# EAGLE board vr60 (EAGLE 9.5.1)

Size 285 x 94.6 mm. Coordinates in mm from the lower left corner, seen from the top.
Outline: 1,0 284,0 arc90 285,1 285,36.6 282,36.6 arc-180 282,39.6 285,39.6 285,93.6 arc90 284,94.6 1,94.6 arc90 0,93.6 0,39.6 3,39.6 arc-180 3,36.6 0,36.6 0,1 arc90 1,0
Copper layers (1*16): Top 0.035mm / dielectric 1.5mm / Bottom 0.035mm
Design rules "default": minimum track width 6mil, minimum drill 0.35mm, track to track 6mil, track to pad 6mil, pad to pad 6mil, via to via 6mil, smd to smd 6mil, copper to edge 40mil, drill to drill 6mil, minimum pad ring 10mil, minimum via ring 8mil, stop-mask expansion 4mil, vias tented up to drill 0mil, thermal gap 10mil
Holes 3 mm at 260.05,66.7 25.2,66.7 128.2,47.6 190.5,9.3 3,38.1 282,38.1 25,65.8 260,65.8 136,56.8 237,20.8 74,15.8

## Footprints (pad centres in the part's own frame; a part is rotated, then mirrored left to right if it is on the bottom)
MX-STABS-200U = hole 3.988: -11.938,8.255; 11.938,8.255 | hole 3.048: -11.938,-6.985; 11.938,-6.985
MX-STABS-625U = hole 3.988: -50,8.255; 50,8.255 | hole 3.048: -50,-6.985; 50,-6.985
SOD-123 = smd 0.914 x 1.219: A 1.638,0; C -1.638,0
MX-5-PIN-HOTSWAP = smd 2.55 x 2.5 bottom: P$1 -7.085,2.54; P$2 5.842,5.08 | hole 3.988: 0,0 | hole 1.75: -5.08,0; 5.08,0 | hole 3: 2.54,5.08; -3.81,2.54

## Placement (x,y rotation side)
B14  MX-STABS-200U  [MX-STABS-200U]  266,85.5 180 top
B41  MX-STABS-200U  [MX-STABS-200U]  263.62,47.5 180 top
B42  MX-STABS-200U  [MX-STABS-200U]  21.38,28.5 180 top
B53  MX-STABS-200U  [MX-STABS-200U]  258.88,28.5 180 top
B57  MX-STABS-625U  [MX-STABS-625U]  130.62,9.5 0 top
D1  [SOD-123]  16.62,90 270 bottom
D2  [SOD-123]  35.62,90 270 bottom
D3  [SOD-123]  54.62,90 270 bottom
D4  [SOD-123]  73.62,90 270 bottom
D5  [SOD-123]  92.62,90 270 bottom
D6  [SOD-123]  111.62,90 270 bottom
D7  [SOD-123]  130.62,90 270 bottom
D8  [SOD-123]  149.62,90 270 bottom
D9  [SOD-123]  168.62,90 270 bottom
D10  [SOD-123]  187.62,90 270 bottom
D11  [SOD-123]  206.62,90 270 bottom
D12  [SOD-123]  225.62,90 270 bottom
D13  [SOD-123]  244.62,90 270 bottom
D14  [SOD-123]  273.12,90 270 bottom
D15  [SOD-123]  21.38,71 270 bottom
D16  [SOD-123]  45.12,71 270 bottom
D17  [SOD-123]  64.12,71 270 bottom
D18  [SOD-123]  83.12,71 270 bottom
D19  [SOD-123]  102.12,71 270 bottom
D20  [SOD-123]  121.12,71 270 bottom
D21  [SOD-123]  140.12,71 270 bottom
D22  [SOD-123]  159.12,71 270 bottom
D23  [SOD-123]  178.12,71 270 bottom
D24  [SOD-123]  197.12,71 270 bottom
D25  [SOD-123]  216.12,71 270 bottom
D26  [SOD-123]  235.12,71 270 bottom
D27  [SOD-123]  254.12,71 270 bottom
D28  [SOD-123]  277.88,71 270 bottom
D29  [SOD-123]  23.75,52 270 bottom
D30  [SOD-123]  49.88,52 270 bottom
D31  [SOD-123]  68.88,52 270 bottom
D32  [SOD-123]  87.88,52 270 bottom
D33  [SOD-123]  106.88,52 270 bottom
D34  [SOD-123]  125.88,52 270 bottom
D35  [SOD-123]  144.88,52 270 bottom
D36  [SOD-123]  163.88,52 270 bottom
D37  [SOD-123]  182.88,52 270 bottom
D38  [SOD-123]  201.88,52 270 bottom
D39  [SOD-123]  220.88,52 270 bottom
D40  [SOD-123]  239.88,52 270 bottom
D41  [SOD-123]  270.75,52 270 bottom
D42  [SOD-123]  28.5,33 270 bottom
D43  [SOD-123]  59.38,33 270 bottom
D44  [SOD-123]  78.38,33 270 bottom
D45  [SOD-123]  97.38,33 270 bottom
D46  [SOD-123]  116.38,33 270 bottom
D47  [SOD-123]  135.38,33 270 bottom
D48  [SOD-123]  154.38,33 270 bottom
D49  [SOD-123]  173.38,33 270 bottom
D50  [SOD-123]  192.38,33 270 bottom
D51  [SOD-123]  211.38,33 270 bottom
D52  [SOD-123]  230.38,33 270 bottom
D53  [SOD-123]  266,33 270 bottom
D54  [SOD-123]  19,14 270 bottom
D55  [SOD-123]  42.75,14 270 bottom
D56  [SOD-123]  66.5,14 270 bottom
D57  [SOD-123]  137.75,14 270 bottom
D58  [SOD-123]  209,14 270 bottom
D59  [SOD-123]  232.75,14 270 bottom
D60  [SOD-123]  256.5,14 270 bottom
D61  [SOD-123]  280.25,14 270 bottom
S1  MX-5-PIN-HOTSWAP  [MX-5-PIN-HOTSWAP]  9.5,85.5 180 top
S2  MX-5-PIN-HOTSWAP  [MX-5-PIN-HOTSWAP]  28.5,85.5 180 top
S3  MX-5-PIN-HOTSWAP  [MX-5-PIN-HOTSWAP]  47.5,85.5 180 top
S4  MX-5-PIN-HOTSWAP  [MX-5-PIN-HOTSWAP]  66.5,85.5 180 top
S5  MX-5-PIN-HOTSWAP  [MX-5-PIN-HOTSWAP]  85.5,85.5 180 top
S6  MX-5-PIN-HOTSWAP  [MX-5-PIN-HOTSWAP]  104.5,85.5 180 top
S7  MX-5-PIN-HOTSWAP  [MX-5-PIN-HOTSWAP]  123.5,85.5 180 top
S8  MX-5-PIN-HOTSWAP  [MX-5-PIN-HOTSWAP]  142.5,85.5 180 top
S9  MX-5-PIN-HOTSWAP  [MX-5-PIN-HOTSWAP]  161.5,85.5 180 top
S10  MX-5-PIN-HOTSWAP  [MX-5-PIN-HOTSWAP]  180.5,85.5 180 top
S11  MX-5-PIN-HOTSWAP  [MX-5-PIN-HOTSWAP]  199.5,85.5 180 top
S12  MX-5-PIN-HOTSWAP  [MX-5-PIN-HOTSWAP]  218.5,85.5 180 top
S13  MX-5-PIN-HOTSWAP  [MX-5-PIN-HOTSWAP]  237.5,85.5 180 top
S14  MX-5-PIN-HOTSWAP  [MX-5-PIN-HOTSWAP]  266,85.5 180 top
S15  MX-5-PIN-HOTSWAP  [MX-5-PIN-HOTSWAP]  14.25,66.5 180 top
S16  MX-5-PIN-HOTSWAP  [MX-5-PIN-HOTSWAP]  38,66.5 180 top
S17  MX-5-PIN-HOTSWAP  [MX-5-PIN-HOTSWAP]  57,66.5 180 top
S18  MX-5-PIN-HOTSWAP  [MX-5-PIN-HOTSWAP]  76,66.5 180 top
S19  MX-5-PIN-HOTSWAP  [MX-5-PIN-HOTSWAP]  95,66.5 180 top
S20  MX-5-PIN-HOTSWAP  [MX-5-PIN-HOTSWAP]  114,66.5 180 top
S21  MX-5-PIN-HOTSWAP  [MX-5-PIN-HOTSWAP]  133,66.5 180 top
S22  MX-5-PIN-HOTSWAP  [MX-5-PIN-HOTSWAP]  152,66.5 180 top
S23  MX-5-PIN-HOTSWAP  [MX-5-PIN-HOTSWAP]  171,66.5 180 top
S24  MX-5-PIN-HOTSWAP  [MX-5-PIN-HOTSWAP]  190,66.5 180 top
S25  MX-5-PIN-HOTSWAP  [MX-5-PIN-HOTSWAP]  209,66.5 180 top
S26  MX-5-PIN-HOTSWAP  [MX-5-PIN-HOTSWAP]  228,66.5 180 top
S27  MX-5-PIN-HOTSWAP  [MX-5-PIN-HOTSWAP]  247,66.5 180 top
S28  MX-5-PIN-HOTSWAP  [MX-5-PIN-HOTSWAP]  270.75,66.5 180 top
S29  MX-5-PIN-HOTSWAP  [MX-5-PIN-HOTSWAP]  16.62,47.5 180 top
S30  MX-5-PIN-HOTSWAP  [MX-5-PIN-HOTSWAP]  42.75,47.5 180 top
S31  MX-5-PIN-HOTSWAP  [MX-5-PIN-HOTSWAP]  61.75,47.5 180 top
S32  MX-5-PIN-HOTSWAP  [MX-5-PIN-HOTSWAP]  80.75,47.5 180 top
S33  MX-5-PIN-HOTSWAP  [MX-5-PIN-HOTSWAP]  99.75,47.5 180 top
S34  MX-5-PIN-HOTSWAP  [MX-5-PIN-HOTSWAP]  118.75,47.5 180 top
S35  MX-5-PIN-HOTSWAP  [MX-5-PIN-HOTSWAP]  137.75,47.5 180 top
S36  MX-5-PIN-HOTSWAP  [MX-5-PIN-HOTSWAP]  156.75,47.5 180 top
S37  MX-5-PIN-HOTSWAP  [MX-5-PIN-HOTSWAP]  175.75,47.5 180 top
S38  MX-5-PIN-HOTSWAP  [MX-5-PIN-HOTSWAP]  194.75,47.5 180 top
S39  MX-5-PIN-HOTSWAP  [MX-5-PIN-HOTSWAP]  213.75,47.5 180 top
S40  MX-5-PIN-HOTSWAP  [MX-5-PIN-HOTSWAP]  232.75,47.5 180 top
S41  MX-5-PIN-HOTSWAP  [MX-5-PIN-HOTSWAP]  263.62,47.5 180 top
S42  MX-5-PIN-HOTSWAP  [MX-5-PIN-HOTSWAP]  21.38,28.5 180 top
S43  MX-5-PIN-HOTSWAP  [MX-5-PIN-HOTSWAP]  52.25,28.5 180 top
S44  MX-5-PIN-HOTSWAP  [MX-5-PIN-HOTSWAP]  71.25,28.5 180 top
S45  MX-5-PIN-HOTSWAP  [MX-5-PIN-HOTSWAP]  90.25,28.5 180 top
S46  MX-5-PIN-HOTSWAP  [MX-5-PIN-HOTSWAP]  109.25,28.5 180 top
S47  MX-5-PIN-HOTSWAP  [MX-5-PIN-HOTSWAP]  128.25,28.5 180 top
S48  MX-5-PIN-HOTSWAP  [MX-5-PIN-HOTSWAP]  147.25,28.5 180 top
S49  MX-5-PIN-HOTSWAP  [MX-5-PIN-HOTSWAP]  166.25,28.5 180 top
S50  MX-5-PIN-HOTSWAP  [MX-5-PIN-HOTSWAP]  185.25,28.5 180 top
S51  MX-5-PIN-HOTSWAP  [MX-5-PIN-HOTSWAP]  204.25,28.5 180 top
S52  MX-5-PIN-HOTSWAP  [MX-5-PIN-HOTSWAP]  223.25,28.5 180 top
S53  MX-5-PIN-HOTSWAP  [MX-5-PIN-HOTSWAP]  258.88,28.5 180 top
S54  MX-5-PIN-HOTSWAP  [MX-5-PIN-HOTSWAP]  11.88,9.5 180 top
S55  MX-5-PIN-HOTSWAP  [MX-5-PIN-HOTSWAP]  35.62,9.5 180 top
S56  MX-5-PIN-HOTSWAP  [MX-5-PIN-HOTSWAP]  59.38,9.5 180 top
S57  MX-5-PIN-HOTSWAP  [MX-5-PIN-HOTSWAP]  130.62,9.5 180 top
S58  MX-5-PIN-HOTSWAP  [MX-5-PIN-HOTSWAP]  201.88,9.5 180 top
S59  MX-5-PIN-HOTSWAP  [MX-5-PIN-HOTSWAP]  225.62,9.5 180 top
S60  MX-5-PIN-HOTSWAP  [MX-5-PIN-HOTSWAP]  249.38,9.5 180 top
S61  MX-5-PIN-HOTSWAP  [MX-5-PIN-HOTSWAP]  273.12,9.5 180 top
Z1  MX-FPRINT-100U19  [MX-FPRINT-1900-100U]  9.5,85.5 0 top
Z2  MX-FPRINT-100U19  [MX-FPRINT-1900-100U]  28.5,85.5 0 top
Z3  MX-FPRINT-100U19  [MX-FPRINT-1900-100U]  47.5,85.5 0 top
Z4  MX-FPRINT-100U19  [MX-FPRINT-1900-100U]  66.5,85.5 0 top
Z5  MX-FPRINT-100U19  [MX-FPRINT-1900-100U]  85.5,85.5 0 top
Z6  MX-FPRINT-100U19  [MX-FPRINT-1900-100U]  104.5,85.5 0 top
Z7  MX-FPRINT-100U19  [MX-FPRINT-1900-100U]  123.5,85.5 0 top
Z8  MX-FPRINT-100U19  [MX-FPRINT-1900-100U]  142.5,85.5 0 top
Z9  MX-FPRINT-100U19  [MX-FPRINT-1900-100U]  161.5,85.5 0 top
Z10  MX-FPRINT-100U19  [MX-FPRINT-1900-100U]  180.5,85.5 0 top
Z11  MX-FPRINT-100U19  [MX-FPRINT-1900-100U]  199.5,85.5 0 top
Z12  MX-FPRINT-100U19  [MX-FPRINT-1900-100U]  218.5,85.5 0 top
Z13  MX-FPRINT-100U19  [MX-FPRINT-1900-100U]  237.5,85.5 0 top
Z14  MX-FPRINT-200U19  [MX-FPRINT-1900-200U]  266,85.5 0 top
Z15  MX-FPRINT-150U19  [MX-FPRINT-1900-150U]  14.25,66.5 0 top
Z16  MX-FPRINT-100U19  [MX-FPRINT-1900-100U]  38,66.5 0 top
Z17  MX-FPRINT-100U19  [MX-FPRINT-1900-100U]  57,66.5 0 top
Z18  MX-FPRINT-100U19  [MX-FPRINT-1900-100U]  76,66.5 0 top
Z19  MX-FPRINT-100U19  [MX-FPRINT-1900-100U]  95,66.5 0 top
Z20  MX-FPRINT-100U19  [MX-FPRINT-1900-100U]  114,66.5 0 top
Z21  MX-FPRINT-100U19  [MX-FPRINT-1900-100U]  133,66.5 0 top
Z22  MX-FPRINT-100U19  [MX-FPRINT-1900-100U]  152,66.5 0 top
Z23  MX-FPRINT-100U19  [MX-FPRINT-1900-100U]  171,66.5 0 top
Z24  MX-FPRINT-100U19  [MX-FPRINT-1900-100U]  190,66.5 0 top
Z25  MX-FPRINT-100U19  [MX-FPRINT-1900-100U]  209,66.5 0 top
Z26  MX-FPRINT-100U19  [MX-FPRINT-1900-100U]  228,66.5 0 top
Z27  MX-FPRINT-100U19  [MX-FPRINT-1900-100U]  247,66.5 0 top
Z28  MX-FPRINT-150U19  [MX-FPRINT-1900-150U]  270.75,66.5 0 top
Z29  MX-FPRINT-175U19  [MX-FPRINT-1900-175U]  16.62,47.5 0 top
Z30  MX-FPRINT-100U19  [MX-FPRINT-1900-100U]  42.75,47.5 0 top
Z31  MX-FPRINT-100U19  [MX-FPRINT-1900-100U]  61.75,47.5 0 top
Z32  MX-FPRINT-100U19  [MX-FPRINT-1900-100U]  80.75,47.5 0 top
Z33  MX-FPRINT-100U19  [MX-FPRINT-1900-100U]  99.75,47.5 0 top
Z34  MX-FPRINT-100U19  [MX-FPRINT-1900-100U]  118.75,47.5 0 top
Z35  MX-FPRINT-100U19  [MX-FPRINT-1900-100U]  137.75,47.5 0 top
Z36  MX-FPRINT-100U19  [MX-FPRINT-1900-100U]  156.75,47.5 0 top
Z37  MX-FPRINT-100U19  [MX-FPRINT-1900-100U]  175.75,47.5 0 top
Z38  MX-FPRINT-100U19  [MX-FPRINT-1900-100U]  194.75,47.5 0 top
Z39  MX-FPRINT-100U19  [MX-FPRINT-1900-100U]  213.75,47.5 0 top
Z40  MX-FPRINT-100U19  [MX-FPRINT-1900-100U]  232.75,47.5 0 top
Z41  MX-FPRINT-225U19  [MX-FPRINT-1900-225U]  263.62,47.5 0 top
Z42  MX-FPRINT-225U19  [MX-FPRINT-1900-225U]  21.38,28.5 0 top
Z43  MX-FPRINT-100U19  [MX-FPRINT-1900-100U]  52.25,28.5 0 top
Z44  MX-FPRINT-100U19  [MX-FPRINT-1900-100U]  71.25,28.5 0 top
Z45  MX-FPRINT-100U19  [MX-FPRINT-1900-100U]  90.25,28.5 0 top
Z46  MX-FPRINT-100U19  [MX-FPRINT-1900-100U]  109.25,28.5 0 top
Z47  MX-FPRINT-100U19  [MX-FPRINT-1900-100U]  128.25,28.5 0 top
Z48  MX-FPRINT-100U19  [MX-FPRINT-1900-100U]  147.25,28.5 0 top
Z49  MX-FPRINT-100U19  [MX-FPRINT-1900-100U]  166.25,28.5 0 top
Z50  MX-FPRINT-100U19  [MX-FPRINT-1900-100U]  185.25,28.5 0 top
Z51  MX-FPRINT-100U19  [MX-FPRINT-1900-100U]  204.25,28.5 0 top
Z52  MX-FPRINT-100U19  [MX-FPRINT-1900-100U]  223.25,28.5 0 top
Z53  MX-FPRINT-275U19  [MX-FPRINT-1900-275U]  258.88,28.5 0 top
Z54  MX-FPRINT-125U19  [MX-FPRINT-1900-125U]  11.88,9.5 0 top
Z55  MX-FPRINT-125U19  [MX-FPRINT-1900-125U]  35.62,9.5 0 top
Z56  MX-FPRINT-125U19  [MX-FPRINT-1900-125U]  59.38,9.5 0 top
Z57  MX-FPRINT-625U19  [MX-FPRINT-1900-625U]  130.62,9.5 0 top
Z58  MX-FPRINT-125U19  [MX-FPRINT-1900-125U]  201.88,9.5 0 top
Z59  MX-FPRINT-125U19  [MX-FPRINT-1900-125U]  225.62,9.5 0 top
Z60  MX-FPRINT-125U19  [MX-FPRINT-1900-125U]  249.38,9.5 0 top
Z61  MX-FPRINT-125U19  [MX-FPRINT-1900-125U]  273.12,9.5 0 top

## Library data of the parts
B14 B41 B42 B53 B57 S1-S61 Z1-Z61 = ts_keyboards
D1-D61 = jlcpcb_basic_parts

## Nets
COL0: D1.C D15.C D29.C D42.C D54.C
COL1: D2.C D16.C D30.C D55.C
COL2: D3.C D17.C D31.C D43.C D56.C
COL3: D4.C D18.C D32.C D44.C
COL4: D5.C D19.C D33.C D45.C
COL5: D6.C D20.C D34.C D46.C
COL6: D7.C D21.C D35.C D47.C D57.C
COL7: D8.C D22.C D36.C D48.C
COL8: D9.C D23.C D37.C D49.C
COL9: D10.C D24.C D38.C D50.C
COL10: D11.C D25.C D39.C D51.C D58.C
COL11: D12.C D26.C D40.C D52.C D59.C
COL12: D13.C D27.C D60.C
COL13: D14.C D28.C D41.C D53.C D61.C
N$1: D1.A S1.P$1
N$2: D2.A S2.P$1
N$3: D3.A S3.P$1
N$4: D4.A S4.P$1
N$5: D5.A S5.P$1
N$6: D6.A S6.P$1
N$7: D7.A S7.P$1
N$8: D8.A S8.P$1
N$9: D9.A S9.P$1
N$10: D10.A S10.P$1
N$11: D11.A S11.P$1
N$12: D12.A S12.P$1
N$13: D13.A S13.P$1
N$14: D14.A S14.P$1
N$15: D15.A S15.P$1
N$16: D16.A S16.P$1
N$17: D17.A S17.P$1
N$18: D18.A S18.P$1
N$19: D19.A S19.P$1
N$20: D20.A S20.P$1
N$21: D21.A S21.P$1
N$22: D22.A S22.P$1
N$23: D23.A S23.P$1
N$24: D24.A S24.P$1
N$25: D25.A S25.P$1
N$26: D26.A S26.P$1
N$27: D27.A S27.P$1
N$28: D28.A S28.P$1
N$29: D29.A S29.P$1
N$30: D30.A S30.P$1
N$31: D31.A S31.P$1
N$32: D32.A S32.P$1
N$33: D33.A S33.P$1
N$34: D34.A S34.P$1
N$35: D35.A S35.P$1
N$36: D36.A S36.P$1
N$37: D37.A S37.P$1
N$38: D38.A S38.P$1
N$39: D39.A S39.P$1
N$40: D40.A S40.P$1
N$41: D41.A S41.P$1
N$42: D42.A S42.P$1
N$43: D43.A S43.P$1
N$44: D44.A S44.P$1
N$45: D45.A S45.P$1
N$46: D46.A S46.P$1
N$47: D47.A S47.P$1
N$48: D48.A S48.P$1
N$49: D49.A S49.P$1
N$50: D50.A S50.P$1
N$51: D51.A S51.P$1
N$52: D52.A S52.P$1
N$53: D53.A S53.P$1
N$54: D54.A S54.P$1
N$55: D55.A S55.P$1
N$56: D56.A S56.P$1
N$57: D57.A S57.P$1
N$58: D58.A S58.P$1
N$59: D59.A S59.P$1
N$60: D60.A S60.P$1
N$61: D61.A S61.P$1
ROW0: S1.P$2 S2.P$2 S3.P$2 S4.P$2 S5.P$2 S6.P$2 S7.P$2 S8.P$2 S9.P$2 S10.P$2 S11.P$2 S12.P$2 S13.P$2 S14.P$2
ROW1: S15.P$2 S16.P$2 S17.P$2 S18.P$2 S19.P$2 S20.P$2 S21.P$2 S22.P$2 S23.P$2 S24.P$2 S25.P$2 S26.P$2 S27.P$2 S28.P$2
ROW2: S29.P$2 S30.P$2 S31.P$2 S32.P$2 S33.P$2 S34.P$2 S35.P$2 S36.P$2 S37.P$2 S38.P$2 S39.P$2 S40.P$2 S41.P$2
ROW3: S42.P$2 S43.P$2 S44.P$2 S45.P$2 S46.P$2 S47.P$2 S48.P$2 S49.P$2 S50.P$2 S51.P$2 S52.P$2 S53.P$2
ROW4: S54.P$2 S55.P$2 S56.P$2 S57.P$2 S58.P$2 S59.P$2 S60.P$2 S61.P$2

## Tracks (layer width: path | path; a pad name or v marks a point on that pad's centre or on a via)
COL0  (4 unrouted)
COL1  (3 unrouted)
COL2  (4 unrouted)
COL3  (3 unrouted)
COL4  (3 unrouted)
COL5  (3 unrouted)
COL6  (4 unrouted)
COL7  (3 unrouted)
COL8  (3 unrouted)
COL9  (3 unrouted)
COL10  (4 unrouted)
COL11  (4 unrouted)
COL12  (2 unrouted)
COL13  (4 unrouted)
N$1  (1 unrouted)
N$2  (1 unrouted)
N$3  (1 unrouted)
N$4  (1 unrouted)
N$5  (1 unrouted)
N$6  (1 unrouted)
N$7  (1 unrouted)
N$8  (1 unrouted)
N$9  (1 unrouted)
N$10  (1 unrouted)
N$11  (1 unrouted)
N$12  (1 unrouted)
N$13  (1 unrouted)
N$14  (1 unrouted)
N$15  (1 unrouted)
N$16  (1 unrouted)
N$17  (1 unrouted)
N$18  (1 unrouted)
N$19  (1 unrouted)
N$20  (1 unrouted)
N$21  (1 unrouted)
N$22  (1 unrouted)
N$23  (1 unrouted)
N$24  (1 unrouted)
N$25  (1 unrouted)
N$26  (1 unrouted)
N$27  (1 unrouted)
N$28  (1 unrouted)
N$29  (1 unrouted)
N$30  (1 unrouted)
N$31  (1 unrouted)
N$32  (1 unrouted)
N$33  (1 unrouted)
N$34  (1 unrouted)
N$35  (1 unrouted)
N$36  (1 unrouted)
N$37  (1 unrouted)
N$38  (1 unrouted)
N$39  (1 unrouted)
N$40  (1 unrouted)
N$41  (1 unrouted)
N$42  (1 unrouted)
N$43  (1 unrouted)
N$44  (1 unrouted)
N$45  (1 unrouted)
N$46  (1 unrouted)
N$47  (1 unrouted)
N$48  (1 unrouted)
N$49  (1 unrouted)
N$50  (1 unrouted)
N$51  (1 unrouted)
N$52  (1 unrouted)
N$53  (1 unrouted)
N$54  (1 unrouted)
N$55  (1 unrouted)
N$56  (1 unrouted)
N$57  (1 unrouted)
N$58  (1 unrouted)
N$59  (1 unrouted)
N$60  (1 unrouted)
N$61  (1 unrouted)
ROW0  (13 unrouted)
ROW1  (13 unrouted)
ROW2  (12 unrouted)
ROW3  (11 unrouted)
ROW4  (7 unrouted)